# Altium PCB Pedal_Display.PcbDoc
Units mm, origin at the board's own origin, x right, y up, seen from the top; angles counter-clockwise.
Board outline 93.54 x 66.99 mm, 2 copper layers (Top Layer, Bottom Layer), stack 1.071 mm thick; 6 components, 50 nets, 109 pads, 0 vias.
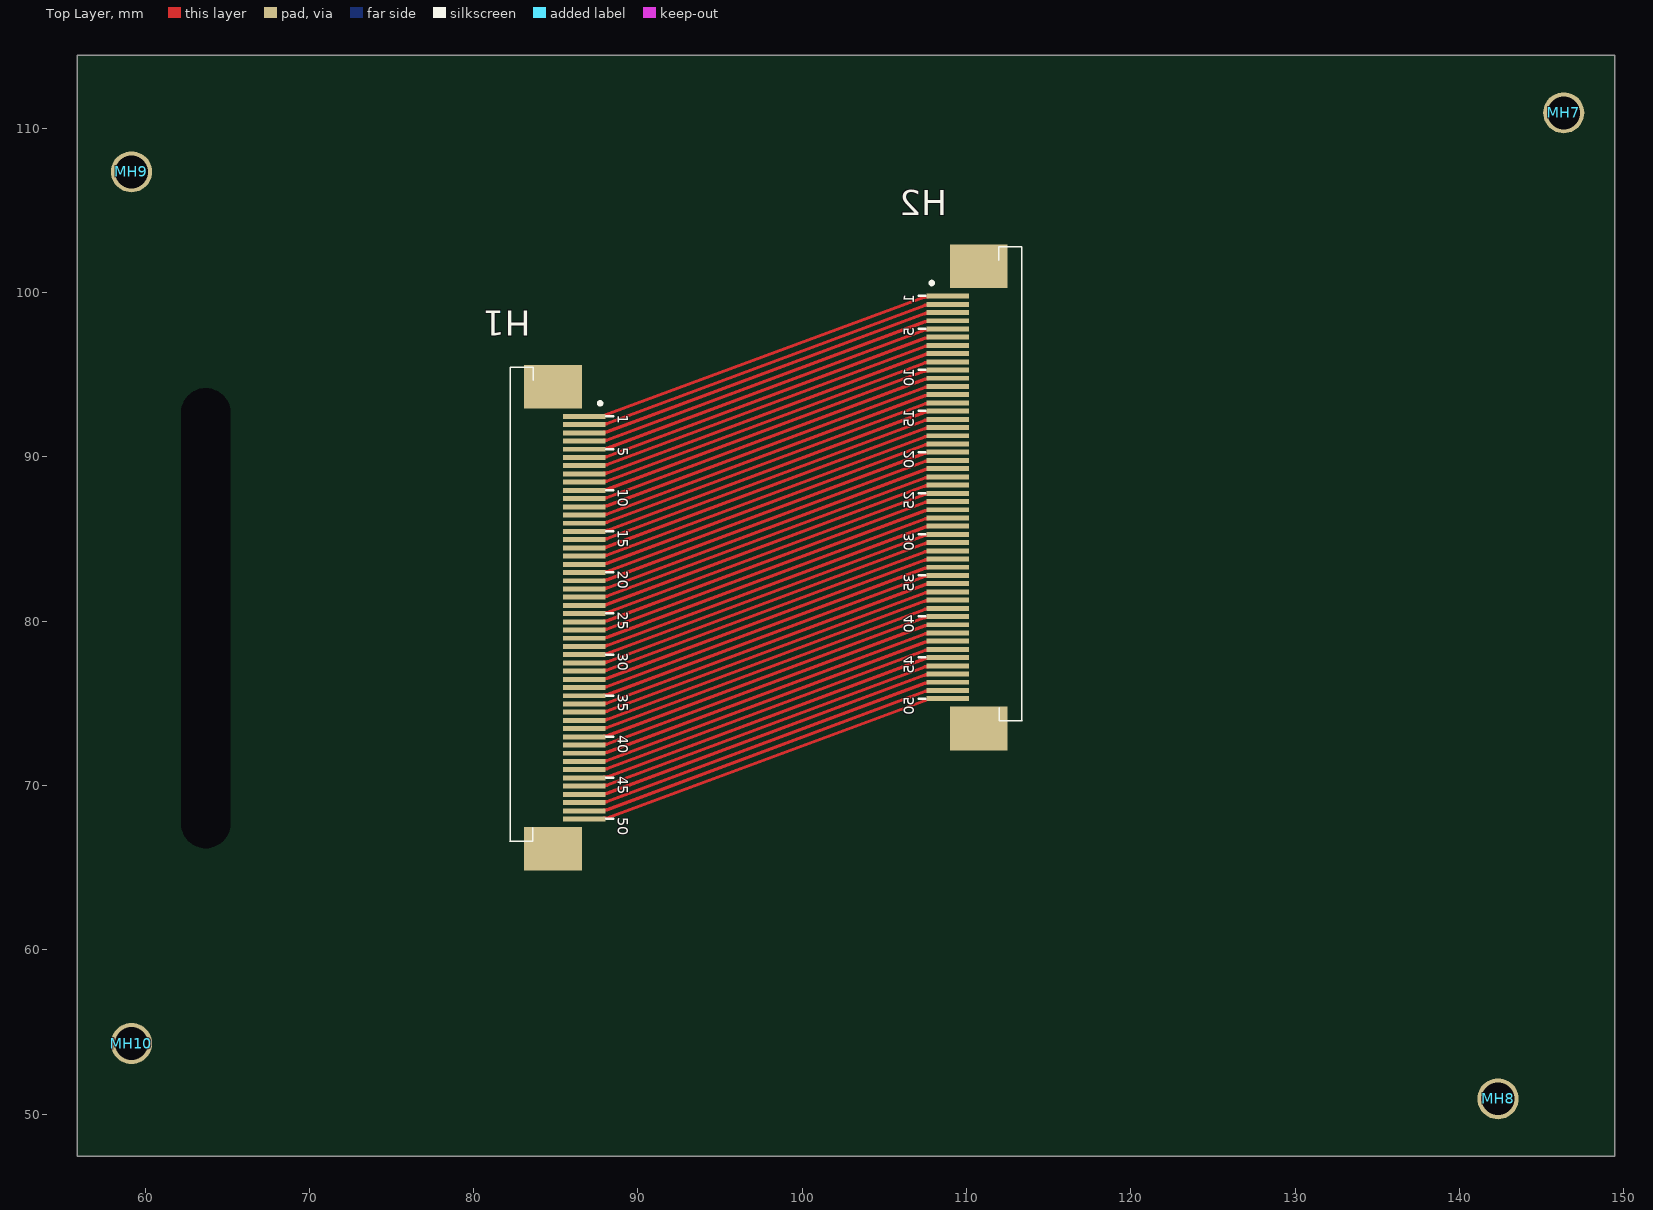
[diagram p0: Top Layer view]
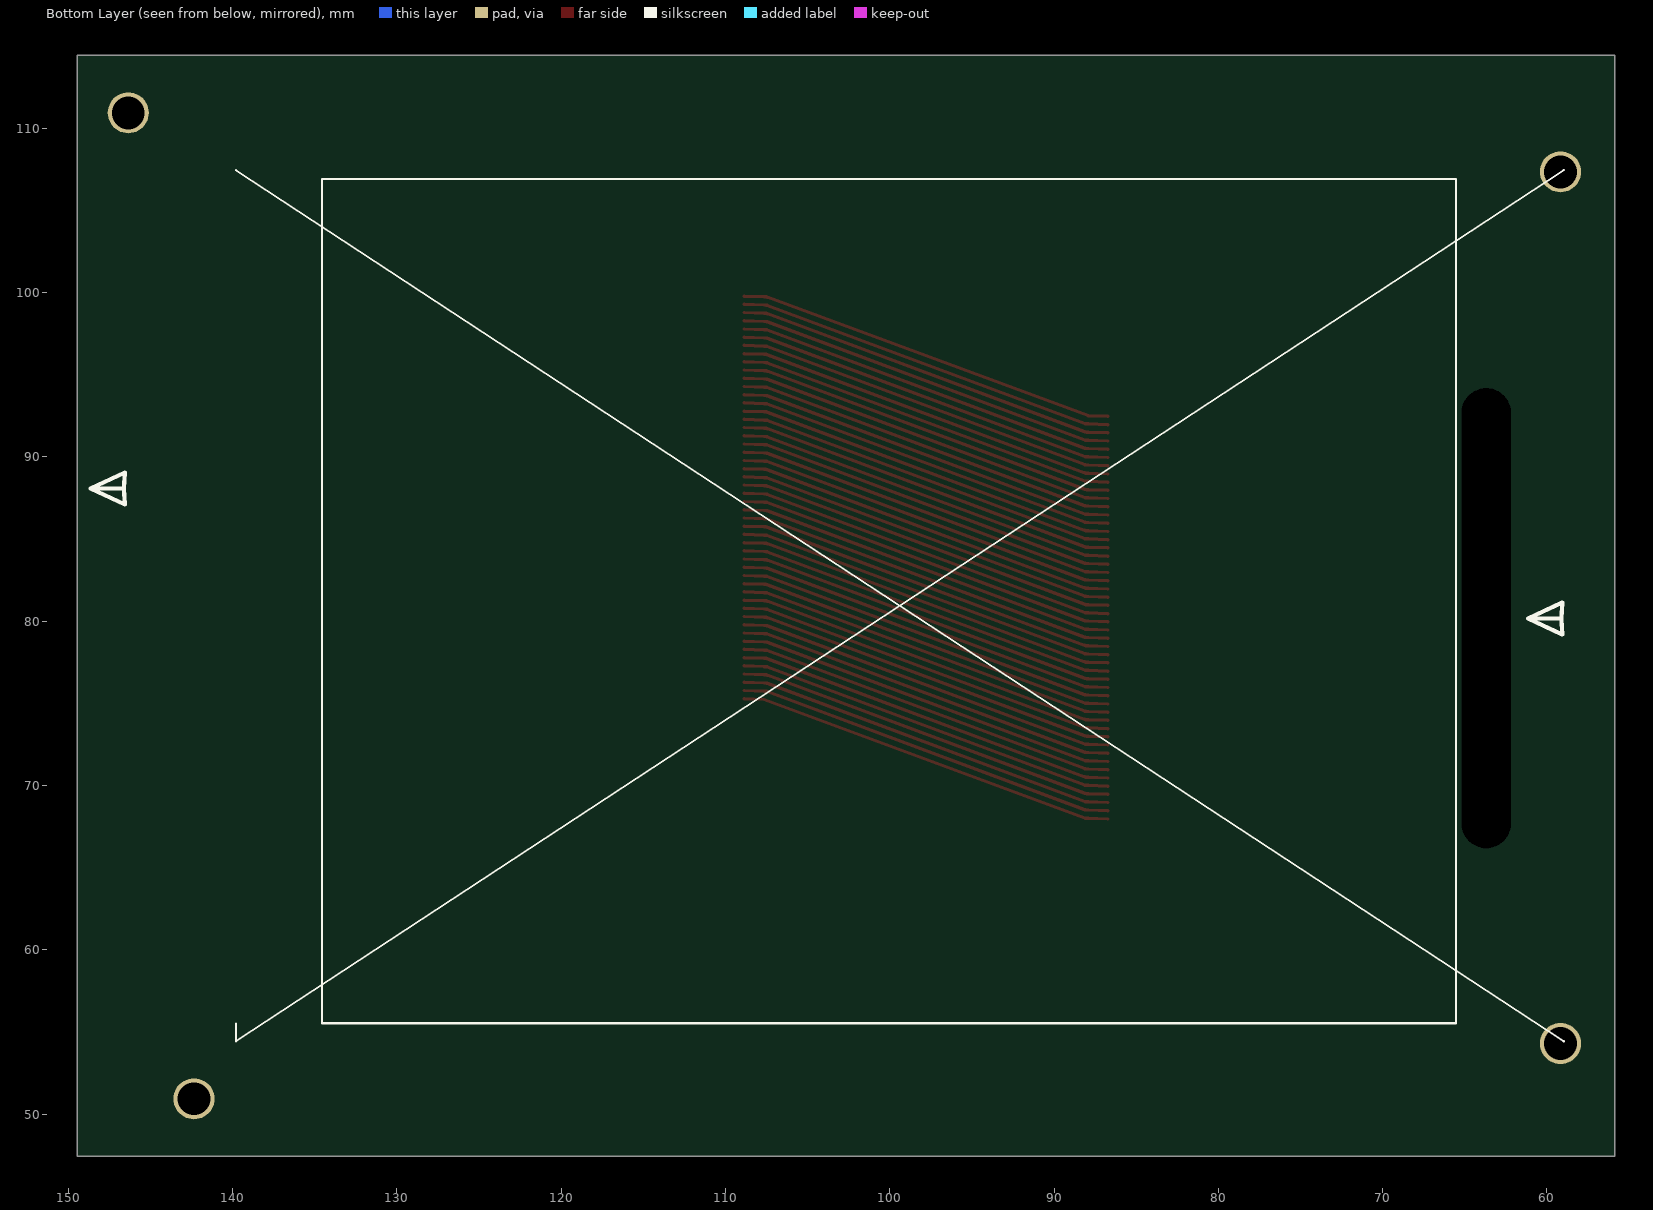
[diagram p1: Bottom Layer view, seen from below]

## Layer stack, top to bottom
Top Solder: solder mask 0.0102, Solder Resist, Dk 3.5
Top Layer: signal copper 0.0356
Dielectric 1: dielectric 1, FR-4, Dk 4.8
Bottom Layer: signal copper 0.0356
Bottom Solder: solder mask 0.0102, Solder Resist, Dk 3.5

## Board outline
55.886,47.432 55.886,114.423 149.431,114.423 149.431,47.432

## Design rules (kind name [scope] priority, off if disabled: settings)
Clearance [All] p1: gap=0.203 ignorepadtopadclearanceinfootprint=FALSE except(0.254: Arc-Hole Track-Hole SMDPad-Hole THPad-Hole Via-Hole Fill-Hole Poly-Hole Region-Hole Text-Hole)
PolygonConnect [All] p1: connectstyle=Relief reliefconductorwidth=0.254 reliefentries=4 polygonreliefangle="90 Angle" airgapwidth=0.254
RoutingVias [All] p1: holewidth=0.3 width=0.6 viastyle="Through Hole" minholewidth=0.3 minwidth=0.6 maxholewidth=0.3 maxwidth=0.6
SolderMaskExpansion [All] p1: expansion=0.102 istentingtop=FALSE
Width [All] p1: maxlimit=0.203 minlimit=0.203 preferedwidth=0.203
30 further rules are at their usual default settings.

## Components (designator, comment, footprint, x,y, rotation, side; value= is the part's Value field where it differs from the comment)
H1 "FFC_50_DBG" FFC_50_DBG#1 84.473,83.954 r270 top
H2 "FFC_50_DBG" FFC_50_DBG#2 111.098,91.275 r270 top
MH7 "MountingHole" Hole_2.5mm 146.336,110.928 r180 top (schematic designator MH5)
MH8 "MountingHole" Hole_2.5mm 142.336,50.928 r180 top (schematic designator MH5)
MH9 "MountingHole" Hole_2.5mm 59.175,107.337 r180 top (schematic designator MH5)
MH10 "MountingHole" Hole_2.5mm 59.174,54.289 r180 top (schematic designator MH5)

## Footprints (in the part's own frame and the unit in brackets; to place one, negate y for a bottom-side part, rotate by r counter-clockwise, add the part's x,y. Pads: shape width x height; smd on the part's side, far side on the other; paste and mask are expansions set on the pad)
FFC_50_DBG#1 [mm]
  rect 0.3x2.6 smd: 1(-8.5,2.25) 2(-8,2.25) 3(-7.5,2.25) 4(-7,2.25) 5(-6.5,2.25) 6(-6,2.25) 7(-5.5,2.25) 8(-5,2.25) 9(-4.5,2.25) 10(-4,2.25) 11(-3.5,2.25) 12(-3,2.25) 13(-2.5,2.25) 14(-2,2.25) 15(-1.5,2.25) 16(-1,2.25) 17(-0.5,2.25) 18(0,2.25) 19(0.5,2.25) 20(1,2.25) 21(1.5,2.25) 22(2,2.25) 23(2.5,2.25) 24(3,2.25) 25(3.5,2.25) 26(4,2.25) 27(4.5,2.25) 28(5,2.25) 29(5.5,2.25) 30(6,2.25) 31(6.5,2.25) 32(7,2.25) 33(7.5,2.25) 34(8,2.25) 35(8.5,2.25) 36(9,2.25) 37(9.5,2.25) 38(10,2.25) 39(10.5,2.25) 40(11,2.25) 41(11.5,2.25) 42(12,2.25) 43(12.5,2.25) 44(13,2.25) 45(13.5,2.25) 46(14,2.25) 47(14.5,2.25) 48(15,2.25) 49(15.5,2.25) 50(16,2.25)
  rect 2.65x3.5 smd: MP1(-10.312,0.356) MP1(17.812,0.356)
  silkscreen extent -11.5,-2.29 17.35,4.01, body extent -11.49,-2.32 19.01,3.32, height 2.06
FFC_50_DBG#2 [mm]
  rect 0.3x2.6 smd: 1(-8.5,-2.25) 2(-8,-2.25) 3(-7.5,-2.25) 4(-7,-2.25) 5(-6.5,-2.25) 6(-6,-2.25) 7(-5.5,-2.25) 8(-5,-2.25) 9(-4.5,-2.25) 10(-4,-2.25) 11(-3.5,-2.25) 12(-3,-2.25) 13(-2.5,-2.25) 14(-2,-2.25) 15(-1.5,-2.25) 16(-1,-2.25) 17(-0.5,-2.25) 18(0,-2.25) 19(0.5,-2.25) 20(1,-2.25) 21(1.5,-2.25) 22(2,-2.25) 23(2.5,-2.25) 24(3,-2.25) 25(3.5,-2.25) 26(4,-2.25) 27(4.5,-2.25) 28(5,-2.25) 29(5.5,-2.25) 30(6,-2.25) 31(6.5,-2.25) 32(7,-2.25) 33(7.5,-2.25) 34(8,-2.25) 35(8.5,-2.25) 36(9,-2.25) 37(9.5,-2.25) 38(10,-2.25) 39(10.5,-2.25) 40(11,-2.25) 41(11.5,-2.25) 42(12,-2.25) 43(12.5,-2.25) 44(13,-2.25) 45(13.5,-2.25) 46(14,-2.25) 47(14.5,-2.25) 48(15,-2.25) 49(15.5,-2.25) 50(16,-2.25)
  rect 2.65x3.5 smd: MP1(-10.312,-0.356) MP1(17.812,-0.356)
  silkscreen extent -11.5,-4.01 17.35,2.29, body extent -11.49,-3.32 19.01,2.32, height 2.06
Hole_2.5mm [mm]
  round 2.5 hole 2: 0(0,0)
  body extent -0.5,-0.5 0.5,0.5, height 0.5

## Part data
H1: System=Connector

## Free pads (board coordinates)
  round 0 hole 3 slot 28 at 90 deg: 7(63.7,80.175)

## Nets (pads, with @x,y where several pads share a name; then routed paths per layer and width w, separated by ;. In a path a pad name is that pad's centre, name@x,y a point inside that pad or via, vN(x,y) a via of type N, cw(c..) or ccw(c..) an arc to the next point about the centre after c; other vN are vias at no path point)
NetH1_1: 
NetH1_2: 
NetH1_3: 
NetH1_4: 
NetH1_5: 
NetH1_6: 
NetH1_7: 
NetH1_8: 
NetH1_9: 
NetH1_10: 
NetH1_11: 
NetH1_12: 
NetH1_13: 
NetH1_14: 
NetH1_15: 
NetH1_16: 
NetH1_17: 
NetH1_18: 
NetH1_19: 
NetH1_20: 
NetH1_21: 
NetH1_22: 
NetH1_23: 
NetH1_24: 
NetH1_25: 
NetH1_26: 
NetH1_27: 
NetH1_28: 
NetH1_29: 
NetH1_30: 
NetH1_31: 
NetH1_32: 
NetH1_33: 
NetH1_34: 
NetH1_35: 
NetH1_36: 
NetH1_37: 
NetH1_38: 
NetH1_39: 
NetH1_40: 
NetH1_41: 
NetH1_42: 
NetH1_43: 
NetH1_44: 
NetH1_45: 
NetH1_46: 
NetH1_47: 
NetH1_48: 
NetH1_49: 
NetH1_50: 
pads on no net: H1.1 H1.2 H1.3 H1.4 H1.5 H1.6 H1.7 H1.8 H1.9 H1.10 H1.11 H1.12 H1.13 H1.14 H1.15 H1.16 H1.17 H1.18 H1.19 H1.20 H1.21 H1.22 H1.23 H1.24 H1.25 H1.26 H1.27 H1.28 H1.29 H1.30 H1.31 H1.32 H1.33 H1.34 H1.35 H1.36 H1.37 H1.38 H1.39 H1.40 H1.41 H1.42 H1.43 H1.44 H1.45 H1.46 H1.47 H1.48 H1.49 H1.50 H1.MP1 H2.1 H2.2 H2.3 H2.4 H2.5 H2.6 H2.7 H2.8 H2.9 H2.10 H2.11 H2.12 H2.13 H2.14 H2.15 H2.16 H2.17 H2.18 H2.19 H2.20 H2.21 H2.22 H2.23 H2.24 H2.25 H2.26 H2.27 H2.28 H2.29 H2.30 H2.31 H2.32 H2.33 H2.34 H2.35 H2.36 H2.37 H2.38 H2.39 H2.40 H2.41 H2.42 H2.43 H2.44 H2.45 H2.46 H2.47 H2.48 H2.49 H2.50 H2.MP1 MH7.0 MH8.0 MH9.0 MH10.0
copper on no net: | length 1171.3
  Top Layer w0.203: 86.723,67.954 87.921,67.999 88.023,67.999 ccw(c88.023,68.304) 88.128,68.018 107.649,75.227 108.848,75.275 ; 86.723,68.454 87.921,68.499 88.023,68.499 ccw(c88.023,68.804) 88.129,68.518 107.441,75.711 cw(c107.548,75.425) 107.548,75.73 107.649,75.73 108.848,75.775 ; 86.723,68.954 87.921,68.999 88.023,68.999 ccw(c88.023,69.304) 88.129,69.018 107.441,76.211 cw(c107.548,75.925) 107.548,76.23 107.649,76.23 108.848,76.275 ; 86.723,69.454 87.921,69.499 88.023,69.499 ccw(c88.023,69.804) 88.129,69.518 107.441,76.711 cw(c107.548,76.425) 107.548,76.73 107.649,76.73 108.848,76.775 ; 86.723,69.954 87.921,69.999 88.023,69.999 ccw(c88.023,70.304) 88.129,70.018 107.441,77.211 cw(c107.548,76.925) 107.548,77.23 107.649,77.23 108.848,77.275 ; 86.723,70.454 87.921,70.499 88.023,70.499 ccw(c88.023,70.804) 88.129,70.518 107.441,77.711 cw(c107.548,77.425) 107.548,77.73 107.649,77.73 108.848,77.775 ; 86.723,70.954 87.921,70.999 88.023,70.999 ccw(c88.023,71.304) 88.129,71.018 107.441,78.211 cw(c107.548,77.925) 107.548,78.23 107.649,78.23 108.848,78.275 ; 86.723,71.454 87.921,71.499 88.023,71.499 ccw(c88.023,71.804) 88.129,71.518 107.441,78.711 cw(c107.548,78.425) 107.548,78.73 107.649,78.73 108.848,78.775 ; 86.723,71.954 87.921,71.999 88.023,71.999 ccw(c88.023,72.304) 88.129,72.018 107.441,79.211 cw(c107.548,78.925) 107.548,79.23 107.649,79.23 108.848,79.275 ; 86.723,72.454 87.921,72.499 88.023,72.499 ccw(c88.023,72.804) 88.129,72.518 107.441,79.711 cw(c107.548,79.425) 107.548,79.73 107.649,79.73 108.848,79.775 ; 86.723,72.954 87.921,72.999 88.023,72.999 ccw(c88.023,73.304) 88.129,73.018 107.441,80.211 cw(c107.548,79.925) 107.548,80.23 107.649,80.23 108.848,80.275 ; 86.723,73.454 87.921,73.499 88.023,73.499 ccw(c88.023,73.804) 88.129,73.518 107.441,80.711 cw(c107.548,80.425) 107.548,80.73 107.649,80.73 108.848,80.775 ; 86.723,73.954 87.921,73.999 88.023,73.999 ccw(c88.023,74.304) 88.129,74.018 107.441,81.211 cw(c107.548,80.925) 107.548,81.23 107.649,81.23 108.848,81.275 ; 86.723,74.454 87.921,74.499 88.023,74.499 ccw(c88.023,74.804) 88.129,74.518 107.441,81.711 cw(c107.548,81.425) 107.548,81.73 107.649,81.73 108.848,81.775 ; 86.723,74.954 87.921,74.999 88.023,74.999 ccw(c88.023,75.304) 88.129,75.018 107.441,82.211 cw(c107.548,81.925) 107.548,82.23 107.649,82.23 108.848,82.275 ; 86.723,75.454 87.921,75.499 88.023,75.499 ccw(c88.023,75.804) 88.129,75.518 107.441,82.711 cw(c107.548,82.425) 107.548,82.73 107.649,82.73 108.848,82.775 ; 86.723,75.954 87.921,75.999 88.023,75.999 ccw(c88.023,76.304) 88.129,76.018 107.441,83.211 cw(c107.548,82.925) 107.548,83.23 107.649,83.23 108.848,83.275 ; 86.723,76.454 87.921,76.499 88.023,76.499 ccw(c88.023,76.804) 88.129,76.518 107.441,83.711 cw(c107.548,83.425) 107.548,83.73 107.649,83.73 108.848,83.775 ; 86.723,76.954 87.921,76.999 88.023,76.999 ccw(c88.023,77.304) 88.129,77.018 107.441,84.211 cw(c107.548,83.925) 107.548,84.23 107.649,84.23 108.848,84.275 ; 86.723,77.454 87.921,77.499 88.023,77.499 ccw(c88.023,77.804) 88.129,77.518 107.441,84.711 cw(c107.548,84.425) 107.548,84.73 107.649,84.73 108.848,84.775 ; 86.723,77.954 87.921,77.999 88.023,77.999 ccw(c88.023,78.304) 88.129,78.018 107.441,85.211 cw(c107.548,84.925) 107.548,85.23 107.649,85.23 108.848,85.275 ; 86.723,78.454 87.921,78.499 88.023,78.499 ccw(c88.023,78.804) 88.129,78.518 107.441,85.711 cw(c107.548,85.425) 107.548,85.73 107.649,85.73 108.848,85.775 ; 86.723,78.954 87.921,78.999 88.023,78.999 ccw(c88.023,79.304) 88.129,79.018 107.441,86.211 cw(c107.548,85.925) 107.548,86.23 107.649,86.23 108.848,86.275 ; 86.723,79.454 87.921,79.499 88.023,79.499 ccw(c88.023,79.804) 88.129,79.518 107.441,86.711 cw(c107.548,86.425) 107.548,86.73 107.649,86.73 108.848,86.775 ; 86.723,79.954 87.921,79.999 88.023,79.999 ccw(c88.023,80.304) 88.129,80.018 107.441,87.211 cw(c107.548,86.925) 107.548,87.23 107.649,87.23 108.848,87.275 ; 86.723,80.454 87.921,80.499 88.023,80.499 ccw(c88.023,80.804) 88.129,80.518 107.441,87.711 cw(c107.548,87.425) 107.548,87.73 107.649,87.73 108.848,87.775 ; 86.723,80.954 87.921,80.999 88.023,80.999 ccw(c88.023,81.304) 88.129,81.018 107.441,88.211 cw(c107.548,87.925) 107.548,88.23 107.649,88.23 108.848,88.275 ; 86.723,81.454 87.921,81.499 88.023,81.499 ccw(c88.023,81.804) 88.129,81.518 107.441,88.711 cw(c107.548,88.425) 107.548,88.73 107.649,88.73 108.848,88.775 ; 86.723,81.954 87.921,81.999 88.023,81.999 ccw(c88.023,82.304) 88.129,82.018 107.441,89.211 cw(c107.548,88.925) 107.548,89.23 107.649,89.23 108.848,89.275 ; 86.723,82.454 87.921,82.499 88.023,82.499 ccw(c88.023,82.804) 88.129,82.518 107.441,89.711 cw(c107.548,89.425) 107.548,89.73 107.649,89.73 108.848,89.775 ; 86.723,82.954 87.921,82.999 88.023,82.999 ccw(c88.023,83.304) 88.129,83.018 107.441,90.211 cw(c107.548,89.925) 107.548,90.23 107.649,90.23 108.848,90.275 ; 86.723,83.454 87.921,83.499 88.023,83.499 ccw(c88.023,83.804) 88.129,83.518 ; 86.723,83.954 87.921,83.999 88.023,83.999 ccw(c88.023,84.304) 88.129,84.018 107.441,91.211 cw(c107.548,90.925) 107.548,91.23 107.649,91.23 108.848,91.275 ; 86.723,84.454 87.921,84.499 88.023,84.499 ccw(c88.023,84.804) 88.129,84.518 107.441,91.711 cw(c107.548,91.425) 107.548,91.73 107.649,91.73 108.848,91.775 ; 86.723,84.954 87.921,84.999 88.023,84.999 ccw(c88.023,85.304) 88.129,85.018 107.441,92.211 cw(c107.548,91.925) 107.548,92.23 107.649,92.23 108.848,92.275 ; 86.723,85.454 87.921,85.499 88.023,85.499 ccw(c88.023,85.804) 88.129,85.518 107.441,92.711 cw(c107.548,92.425) 107.548,92.73 107.649,92.73 108.848,92.775 ; 86.723,85.954 87.921,85.999 88.023,85.999 ccw(c88.023,86.304) 88.129,86.018 107.441,93.211 cw(c107.548,92.925) 107.548,93.23 107.649,93.23 108.848,93.275 ; 86.723,86.454 87.921,86.499 88.023,86.499 ccw(c88.023,86.804) 88.129,86.518 107.441,93.711 cw(c107.548,93.425) 107.548,93.73 107.649,93.73 108.848,93.775 ; 86.723,86.954 87.921,86.999 88.023,86.999 ccw(c88.023,87.304) 88.129,87.018 107.441,94.211 cw(c107.548,93.925) 107.548,94.23 107.649,94.23 108.848,94.275 ; 86.723,87.454 87.921,87.499 88.023,87.499 ccw(c88.023,87.804) 88.129,87.518 107.441,94.711 cw(c107.548,94.425) 107.548,94.73 107.649,94.73 108.848,94.775 ; 86.723,87.954 87.921,87.999 88.023,87.999 ccw(c88.023,88.304) 88.129,88.018 107.441,95.211 cw(c107.548,94.925) 107.548,95.23 107.649,95.23 108.848,95.275 ; 86.723,88.454 87.921,88.499 88.023,88.499 ccw(c88.023,88.804) 88.129,88.518 107.441,95.711 cw(c107.548,95.425) 107.548,95.73 107.649,95.73 108.848,95.775 ; 86.723,88.954 87.921,88.999 88.023,88.999 ccw(c88.023,89.304) 88.129,89.018 107.441,96.211 cw(c107.548,95.925) 107.548,96.23 107.649,96.23 108.848,96.275 ; 86.723,89.454 87.921,89.499 88.023,89.499 ccw(c88.023,89.804) 88.129,89.518 107.441,96.711 cw(c107.548,96.425) 107.548,96.73 107.649,96.73 108.848,96.775 ; 86.723,89.954 87.921,89.999 88.023,89.999 ccw(c88.023,90.304) 88.129,90.018 107.441,97.211 cw(c107.548,96.925) 107.548,97.23 107.649,97.23 108.848,97.275 ; 86.723,90.454 87.921,90.499 88.023,90.499 ccw(c88.023,90.804) 88.129,90.518 107.441,97.711 cw(c107.548,97.425) 107.548,97.73 107.649,97.73 108.848,97.775 ; 86.723,90.954 87.921,90.999 88.023,90.999 ccw(c88.023,91.304) 88.129,91.018 107.441,98.211 cw(c107.548,97.925) 107.548,98.23 107.649,98.23 108.848,98.275 ; 86.723,91.454 87.921,91.499 88.023,91.499 ccw(c88.023,91.804) 88.129,91.518 107.441,98.711 cw(c107.548,98.425) 107.548,98.73 107.649,98.73 108.848,98.775 ; 86.723,91.954 87.921,91.999 88.023,91.999 ccw(c88.023,92.304) 88.129,92.018 107.441,99.211 cw(c107.548,98.925) 107.548,99.23 107.649,99.23 108.848,99.275 ; 86.723,92.454 87.921,92.502 107.442,99.711 cw(c107.548,99.425) 107.548,99.73 107.649,99.73 108.848,99.775 ; 88.129,83.518 107.441,90.711 cw(c107.548,90.425) 107.548,90.73 107.649,90.73 108.848,90.775

## Silkscreen, mask and mechanical layers (free items; w line width, h text height)
Bottom Overlay:
  lines w0.127: 58.981,54.428 139.791,107.438 ; 58.981,107.438 139.791,54.428 139.791,55.516 ; 65.525,55.525 65.525,106.9 134.55,106.9 134.55,55.525 65.525,55.525
  lines w0.254: 59.123,80.15 61.148,80.15 ; 59.123,80.15 59.073,81.125 61.148,80.15 ; 59.123,80.15 59.073,79.175 61.148,80.15 ; 146.598,88.071 146.548,87.096 148.623,88.071 ; 146.598,88.071 146.548,89.046 148.623,88.071 ; 146.598,88.071 148.623,88.071
Mechanical 3:
  circle w0.013: c139.599,54.288 r1
  circle w0.013: c139.598,107.336 r1
  circle w0.013: c56.437,50.927 r1
  circle w0.013: c52.437,110.927 r1
  circle w0.013: c139.791,54.428 r3
  circle w0.013: c139.791,54.428 r1.5
  circle w0.013: c139.791,107.438 r3
  circle w0.013: c139.791,107.438 r1.5
  circle w0.013: c58.981,54.428 r3
  circle w0.013: c58.981,54.428 r1.5
  circle w0.013: c58.981,107.438 r3
  circle w0.013: c58.981,107.438 r1.5
  circle w0.006: c55.886,50.933 r0.003
  lines w0.013: 55.886,50.933 142.886,50.933 142.886,110.933 55.886,110.933 55.886,50.933
Mechanical 6:
  circle w0.013: c59.174,54.289 r1
  circle w0.013: c59.175,107.337 r1
  circle w0.013: c146.336,110.928 r1
  circle w0.013: c142.336,50.928 r1
  circle w0.013: c139.791,107.438 r1.5
  lines w0.013: 55.886,50.933 55.886,110.933 ; 58.431,47.432 145.431,47.432 ; 62.431,114.423 149.431,114.423 149.431,54.423 ; 142.886,50.933 142.886,110.933 ; 147.401,75.528 ccw(c148.401,75.528) 149.401,75.528 149.401,100.528 ccw(c148.401,100.528) 147.401,100.528 147.401,75.528
  lines w0.254: 55.886,50.933 55.886,47.432 58.431,47.432 ; 55.886,110.933 55.886,114.423 62.431,114.423 ; 145.431,47.432 149.431,47.432 149.431,54.423

## Text inside footprints (layer, text, board x,y; h text height)
H1: Top Overlay "1" at 88.765,92.565 h0.64 r270; Top Overlay "5" at 88.765,90.565 h0.64 r270; Top Overlay "10" at 88.765,88.065 h0.64 r270; Top Overlay "15" at 88.765,85.565 h0.64 r270; Top Overlay "20" at 88.765,83.065 h0.64 r270; Top Overlay "25" at 88.765,80.565 h0.64 r270; Top Overlay "30" at 88.765,78.065 h0.64 r270; Top Overlay "35" at 88.765,75.565 h0.64 r270; Top Overlay "40" at 88.765,73.065 h0.64 r270; Top Overlay "45" at 88.765,70.565 h0.64 r270; Top Overlay "50" at 88.765,68.065 h0.64 r270
H2: Top Overlay "1" at 106.805,99.886 h0.64 r90; Top Overlay "5" at 106.805,97.886 h0.64 r90; Top Overlay "10" at 106.805,95.386 h0.64 r90; Top Overlay "15" at 106.805,92.886 h0.64 r90; Top Overlay "20" at 106.805,90.386 h0.64 r90; Top Overlay "25" at 106.805,87.886 h0.64 r90; Top Overlay "30" at 106.805,85.386 h0.64 r90; Top Overlay "35" at 106.805,82.886 h0.64 r90; Top Overlay "40" at 106.805,80.386 h0.64 r90; Top Overlay "45" at 106.805,77.886 h0.64 r90; Top Overlay "50" at 106.805,75.386 h0.64 r90